# Allegro board pcb_tutorial.brd

Outline 100 x 50 mm; copper layers: TOP, POWERPLANE_1, BOTTOM. Coordinates in mm from the lower left corner of the outline.
Outline path: rectangle 0,0 100,50

## Design rules (mm)
constraint set DEFAULT: min track width 0.13
net group DPD: nets D+ D-

## Placement (name value [footprint] x y rotation side)
C1  10uF  [0402-CAP]  12 36 270 top
C2  100uF  [1210]  7 30 0 top
C3  10uF  [0402-CAP]  35 19 180 top
C4  0.1uF  [0402-CAP]  5 20 0 top
C5  0.1uF  [0402-CAP]  5 17 0 top
C6  0.1uF  [0402-CAP]  10 41 90 top
C7  0.1uF  [0402-CAP]  33 27 90 top
C8  0.1uF  [0402-CAP]  7 41 90 top
C9  10uF  [0402-CAP]  11 26 180 top
IC1  PIC32MX440F512H  [SQFP-S-10X10-64]  21 25 90 top
JP1  -  [XTEND-DIGI-MODEM]  69 25 0 top
JP2  PIC 32 PROG  [1X06_LOCK]  16 11 0 top
MAIN_PWR  LED  [LED_LNJ]  24 4 90 top
NOREF  -  []  -75 -91 0 top
NOREF#2  -  [unnamed#2]  96 4 0 top
NOREF#3  -  [unnamed#2]  4 46 0 top
NOREF#4  -  [unnamed#2]  96 46 0 top
NOREF#5  -  []  0 50 0 top
NOREF#6  -  [unnamed#2]  4 4 0 top
NOREF#7  -  []  99.7 0.3 90 top
R1  150  [0402-RES]  20 4 90 top
R2  56k  [0402-RES]  35 22 180 top
U1  LT1965EMS8E-1P5  [MSOP_8_ADI]  6 36 0 top
X1  USB-B  [USB-MICROB]  20 46 180 top
Y1  8MHz  [CRYSTAL-SMD]  22 36 270 top

## Library data of the parts
C1-C9 = CAP NP
IC1 = PIC32MX440F512H
JP1 = XTEND-DIGI-MODEM
JP2 = M06_LOCK
MAIN_PWR = LED: Tolerance: TOL
R1 R2 = RESISTOR
U1 = LT1965EMS8E-1P5_1: User Part Number: PN; Tolerance: TOL
X1 = USB-MICROB
Y1 = CRYSTAL

## Footprints (pads in the part's own frame, mm; a bottom-side part is the same pattern mirrored in y, then rotated)
1X06_LOCK
  round 1.88 hole 1.02: 1(0,0) 2(2.54,-0.25) 3(5.08,0) 4(7.62,-0.25) 5(10.16,0) 6(12.7,-0.25)
0402-CAP
  rect 0.7x0.9 smd: 1(-0.65,0) 2(0.65,0)
0402-RES
  rect 0.7x0.9 smd: 1(-0.65,0) 2(0.65,0)
1210
  rect 1.2x2 smd: 1(-1.6,0) 2(1.6,0)
CRYSTAL-SMD
  rect 1.1x1.9 smd: 1(-1.15,1.85) 2(-1.15,-1.85) 3(1.15,-1.85) 4(1.15,1.85)
LED_LNJ
  rect 0.44x0.95 smd: 1(-0.65,0) 2(0.65,0)
MSOP_8_ADI
  rect 1.31x0.43 smd: 1(-2.24,0.98) 2(-2.24,0.33) 3(-2.24,-0.33) 4(-2.24,-0.98) 5(2.24,-0.98) 6(2.24,-0.33) 7(2.24,0.33) 8(2.24,0.98)
SQFP-S-10X10-64
  rect 1.6x0.29 smd: 1(-5.6,3.75) 2(-5.6,3.25) 3(-5.6,2.75) 4(-5.6,2.25) 5(-5.6,1.75) 6(-5.6,1.25) 7(-5.6,0.75) 8(-5.6,0.25) 9(-5.6,-0.25) 10(-5.6,-0.75) 11(-5.6,-1.25) 12(-5.6,-1.75) 13(-5.6,-2.25) 14(-5.6,-2.75) 15(-5.6,-3.25) 16(-5.6,-3.75) 33(5.6,-3.75) 34(5.6,-3.25) 35(5.6,-2.75) 36(5.6,-2.25) 37(5.6,-1.75) 38(5.6,-1.25) 39(5.6,-0.75) 40(5.6,-0.25) 41(5.6,0.25) 42(5.6,0.75) 43(5.6,1.25) 44(5.6,1.75) 45(5.6,2.25) 46(5.6,2.75) 47(5.6,3.25) 48(5.6,3.75)
  rect 0.29x1.6 smd: 17(-3.75,-5.6) 18(-3.25,-5.6) 19(-2.75,-5.6) 20(-2.25,-5.6) 21(-1.75,-5.6) 22(-1.25,-5.6) 23(-0.75,-5.6) 24(-0.25,-5.6) 25(0.25,-5.6) 26(0.75,-5.6) 27(1.25,-5.6) 28(1.75,-5.6) 29(2.25,-5.6) 30(2.75,-5.6) 31(3.25,-5.6) 32(3.75,-5.6) 49(3.75,5.6) 50(3.25,5.6) 51(2.75,5.6) 52(2.25,5.6) 53(1.75,5.6) 54(1.25,5.6) 55(0.75,5.6) 56(0.25,5.6) 57(-0.25,5.6) 58(-0.75,5.6) 59(-1.25,5.6) 60(-1.75,5.6) 61(-2.25,5.6) 62(-2.75,5.6) 63(-3.25,5.6) 64(-3.75,5.6)
unnamed#2
  round 4.06 hole 3.81: (0,0)
USB-MICROB
  rect 0.35x1.4 smd: D+(0,2.65) D-(-0.65,2.65) GND(1.3,2.65) ID(0.65,2.65) VBUS(-1.3,2.65)
  rect 1.8x1.9 smd: MT1(-3.8,0) MT2(3.8,0)
  rect 2.1x1.6 smd: MT3(-3.1,2.55) MT4(3.1,2.55)
  rect 1.9x1.9 smd: P_1(-1.2,0) P_2(1.2,0)
XTEND-DIGI-MODEM
  round 0 hole 3.3 unplated: (-26.5,14.5) (-26.5,-14.5) (26.5,14.5) (26.5,-14.5)
  round 1.42 hole 0.7: 1(-27.5,9) 2(-25.5,9) 3(-27.5,7) 4(-25.5,7) 5(-27.5,5) 6(-25.5,5) 7(-27.5,3) 8(-25.5,3) 9(-27.5,1) 10(-25.5,1) 11(-27.5,-1) 12(-25.5,-1) 13(-27.5,-3) 14(-25.5,-3) 15(-27.5,-5) 16(-25.5,-5) 17(-27.5,-7) 18(-25.5,-7) 19(-27.5,-9) 20(-25.5,-9)

## Nets
3.3V: C2.1 C4.1 C5.1 C6.1 C7.1 C8.1 IC1.10 IC1.19 IC1.26 IC1.35 IC1.38 JP2.2 R1.1 R2.2 U1.1 U1.2 U1.3(\SENSE/ADJ*\)
GND: C1.2 C2.2 C3.2 C4.2 C5.2 C6.2 C7.2 C8.2 C9.2 IC1.9 IC1.20 IC1.25 IC1.41 JP1.1 JP2.3 MAIN_PWR.1(\CATHODE\) U1.4 U1.5 X1.GND Y1.2 Y1.4(\GND_4\)
VBUS: C1.1 IC1.34 JP1.2(\VCC\) U1.6 U1.7 U1.8 X1.VBUS(\VBUS\)
CTS: IC1.21 JP1.9
D+: IC1.37 X1.D+
D-: IC1.36 X1.D-
PROG0: IC1.17 JP2.5
PROG1: IC1.18 JP2.4
RESET: IC1.7(\_MCLR\) JP2.1
RTS: IC1.29 JP1.10
SHDN: IC1.59 JP1.7
URX: IC1.31 JP1.6
UTX: IC1.32 JP1.5
N01899: MAIN_PWR.2 R1.2
N02098: IC1.39 Y1.1
N02102: IC1.40 Y1.3
N02114: C9.1 IC1.56
N02189: C3.1 JP1.11 R2.1

Pads without a net: IC1 1 2 3 4 5 6 8 11 12 13 14 15 16 22 23 24 27 28 30 33 42 43 44 45 46 47 48 49 50 51 52 53 54 55 57 58 60 61 62 63 64; JP1 3 4 8 12 13 14 15 16 17 18 19 20; JP2 6; X1 ID MT1 MT2 MT3 MT4 P_1 P_2

## Via types
v1: diameter 0.61, hole 0.33, TOP to BOTTOM, 38 vias

## Routing (per net, layer and track width the routed paths; a pad name or vN(x,y) marks a point on that pad's centre or on a via; arc(x,y) is an arc through that point)
3.3V: length 21.1
  TOP w0.28: IC1.35 v1(23.75,29.37) ; IC1.38 v1(22.25,31.83) ; IC1.10 v1(21.75,20.63) ; IC1.26 v1(25.37,25.75) ; IC1.19 v1(27.83,22.25)
  TOP w0.38: U1.3 v1(2.32,35.67) ; C5.1 v1(3.57,17) ; U1.1 v1(2.32,36.98) ; R2.2 v1(33.57,22) ; C4.1 v1(3.57,20) ; R1.1 v1(20,2.57) ; C6.1 v1(10,39.57) ; C8.1 v1(7,39.57) ; C7.1 v1(33,25.57) ; U1.2 v1(2.67,36.33) ; C2.1 v1(4.37,30)
  POWERPLANE_1 w0.13: 18.54,9.62 JP2.2 ; JP2.2 19.67,10.75 ; JP2.2 18.54,11.88 ; JP2.2 17.41,10.75
GND: length 43.1
  TOP w0.28: IC1.25 v1(27.83,25.25) ; IC1.9 v1(21.25,18.17) ; IC1.20 v1(25.37,22.75)
  TOP w0.38: C9.2 v1(9.57,26) ; C7.2 v1(33,28.43) ; U1.4 3.02,35.02 v1(2.56,34.56) ; C8.2 v1(7,42.43) ; C1.2 v1(12,34.57) ; C5.2 v1(6.43,17) ; IC1.41 v1(20.75,31.83) 18.56,34.02 18.56,35.96 19.75,37.15 Y1.2 v1(20.15,38.13) 20.61,38.59 24.77,38.59 25.6,37.76 25.6,35.2 25.25,34.85 v1(25.23,34.85) Y1.4 ; C4.2 v1(6.43,20) ; U1.5 v1(9.32,35.02) ; MAIN_PWR.1 v1(24,2.7) ; C2.2 v1(9.63,30) ; C3.2 v1(33.57,19) ; C6.2 v1(10,42.43) ; X1.GND v1(18.7,42.22)
  BOTTOM w0.13: 40.6,34 JP1.1 ; JP1.1 41.5,33.1 ; JP1.1 41.5,34.9 ; JP1.1 42.4,34 ; JP2.3 21.08,12.13 ; JP2.3 22.21,11 ; JP2.3 19.95,11 ; JP2.3 21.08,9.87
VBUS: length 65.1
  TOP w0.13: 10.24,36.33 9.59,36.98 U1.8 ; 10.24,36.33 U1.7 ; 10.24,36.33 11.03,36.33 11.35,36.65 C1.1 13.27,36.65 v1(13.44,36.48) ; 10.24,36.33 9.58,35.67 U1.6 ; v1(31.36,34.56) 36.48,34.56 36.83,34.91 42.59,34.91 JP1.2 ; v1(31.36,34.56) 28.8,32 24.65,32 24.25,31.6 IC1.34 ; v1(31.36,34.56) 31.36,35.3 26.34,40.32 23.81,40.32 21.3,42.83 X1.VBUS
  BOTTOM w0.13: v1(31.36,34.56) 29.44,36.48 v1(13.44,36.48)
CTS: length 16
  TOP w0.13: JP1.9 38.16,26 35.41,23.25 IC1.21
D+: length 20.7
  TOP w0.13: IC1.37 22.75,31.91 24.12,33.28 25.6,33.28 27.52,35.2 27.52,38.4 26.24,39.68 22.77,39.68 20,42.45 X1.D+
D-: length 20.5
  TOP w0.13: X1.D- 20.65,42.17 22.88,39.94 26.35,39.94 27.78,38.51 27.78,35.09 25.58,32.89 24.1,32.89 23.25,32.04 IC1.36
PROG0: length 12.5
  TOP w0.13: JP2.5 28.03,12.87 28.03,21.25 IC1.17
PROG1: length 20.6
  TOP w0.13: JP2.4 24.76,9.61 29.17,9.61 29.84,10.28 29.84,19.95 28.04,21.75 IC1.18
RESET: length 10.2
  TOP w0.13: JP2.1 20.25,15.25 IC1.7
RTS: length 17.4
  TOP w0.13: JP1.10 42.59,26.91 28.13,26.91 27.79,27.25 IC1.29
SHDN: length 33.1
  TOP w0.13: IC1.59 14.4,23.75 14.33,23.68 v1(12.8,23.68)
  BOTTOM w0.13: v1(12.8,23.68) 37.18,23.68 JP1.7
URX: length 17.6
  TOP w0.13: IC1.31 30.81,28.25 31.65,29.09 42.59,29.09 JP1.6
UTX: length 15.4
  TOP w0.13: JP1.5 31.92,30 30.67,28.75 IC1.32
N01899: length 4
  TOP w0.13: R1.2 MAIN_PWR.2
N02098: length 7.7
  TOP w0.13: Y1.1 23.45,37.15 21.75,35.45 IC1.39
N02102: length 4.7
  TOP w0.13: IC1.40 21.25,32.51 20.15,33.61 Y1.3
N02114: length 4.1
  TOP w0.13: IC1.56 12.3,25.25 11.65,25.9 C9.1
N02189: length 9.7
  TOP w0.13: C3.1 R2.1 35.65,22.1 37.55,24 JP1.11

## Copper pours and planes (outline as drawn; the poured copper is in the pictures)
3.3V on POWERPLANE_1: 0.34,49.66 99.66,49.66 99.66,0.34 0.34,0.34
GND on BOTTOM: 0.31,49.69 99.69,49.69 99.69,0.31 0.31,0.31 ; 1 cut-out

## Text on the board
User.Comments: dfgdfg | gddfg | Blah blah blah | more text | line 3 | 4th thin here | 5th line | 6th and last?
XSECTION_CHART: *  SURFACE | L1 TOP CONDUCTOR | *  DIELECTRIC | L2 POWERPLANE_1 PLANE | L3 BOTTOM CONDUCTOR | DESIGN CROSS SECTION CHART | ___________________________ | TOTAL THICKNESS 0.4978 MM | 1-3
DIMENSION: FIGURE | FINISHED_SIZE | 0.33 | 0.7 | 1.02 | 3.81 | 3.3 | DRILL CHART: TOP to BOTTOM | ALL UNITS ARE IN MILLIMETERS | PLATED | NON-PLATED | QTY | 38 | 20 | 6 | 4
